# Altium PCB PCB1.PcbDoc
Units mil, origin at the board's own origin, x right, y up, seen from the top; angles counter-clockwise.
Board outline 5250 x 4000 mil, 2 copper layers (Top Layer, Bottom Layer); 35 components, 24 nets, 125 pads, 0 vias.
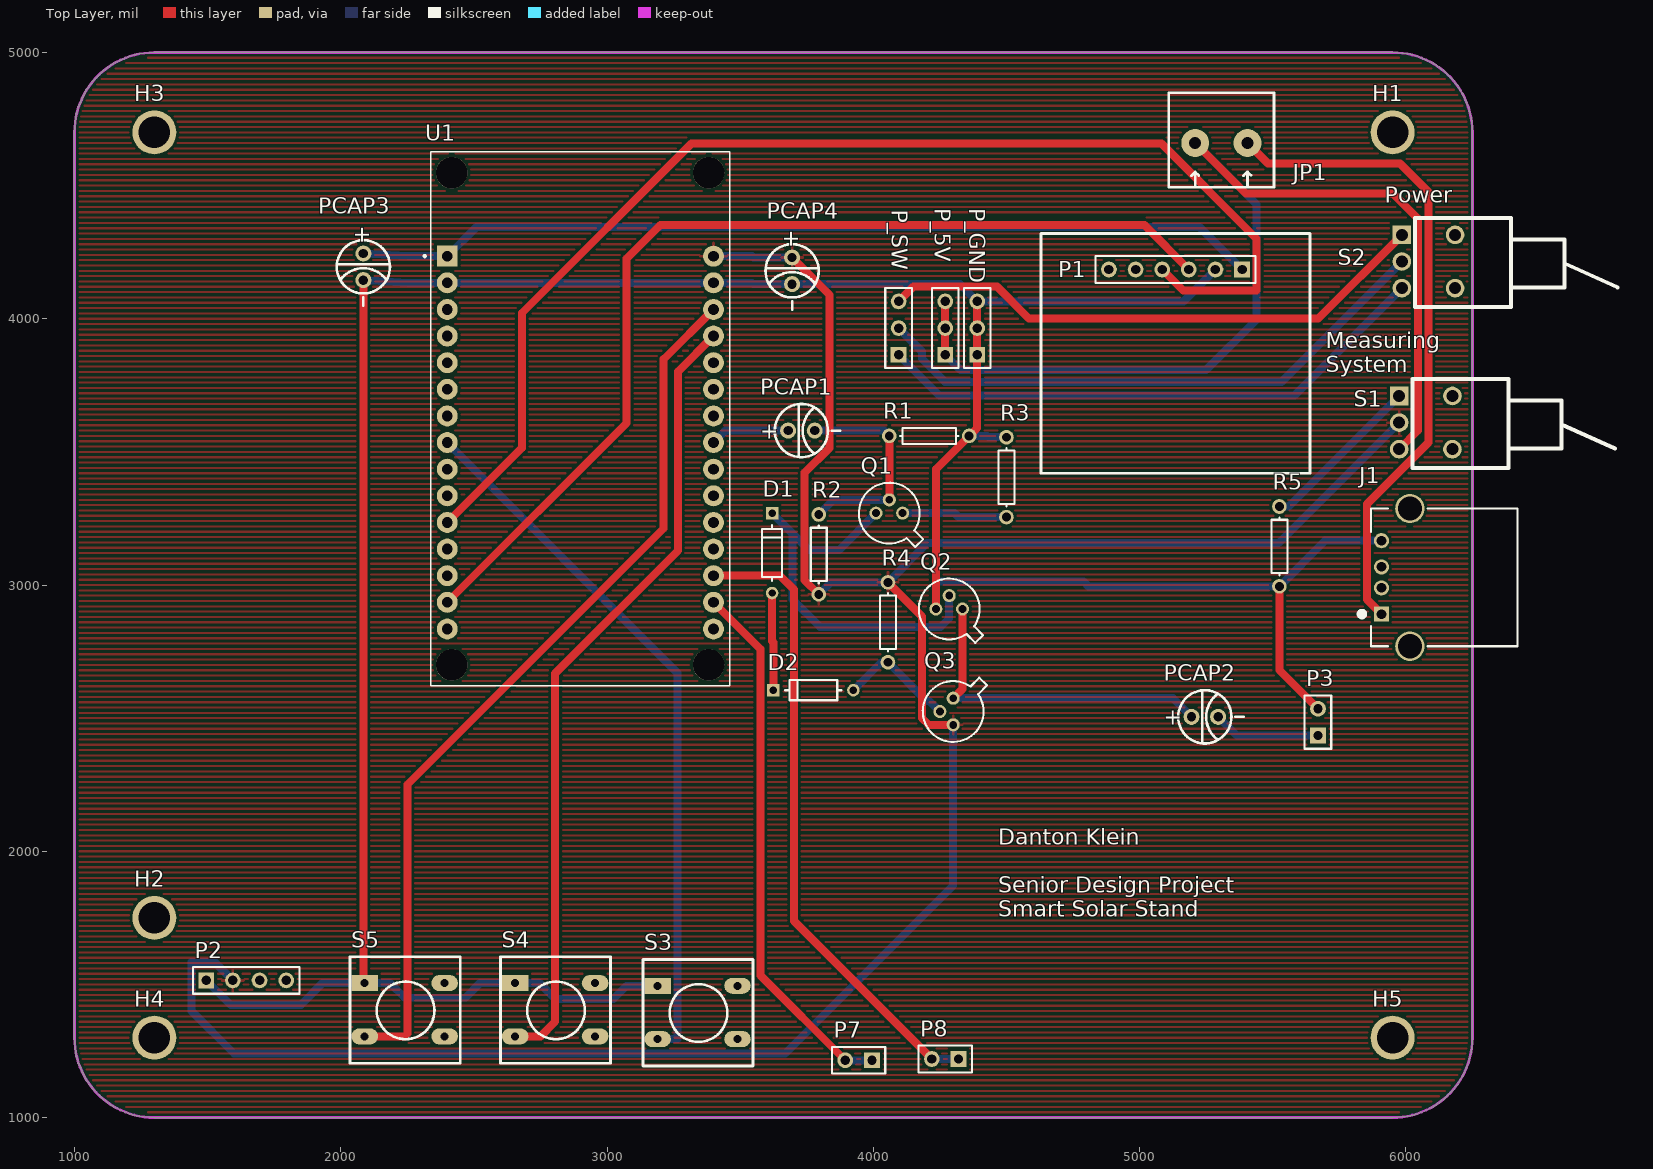
[diagram p0: Top Layer view]
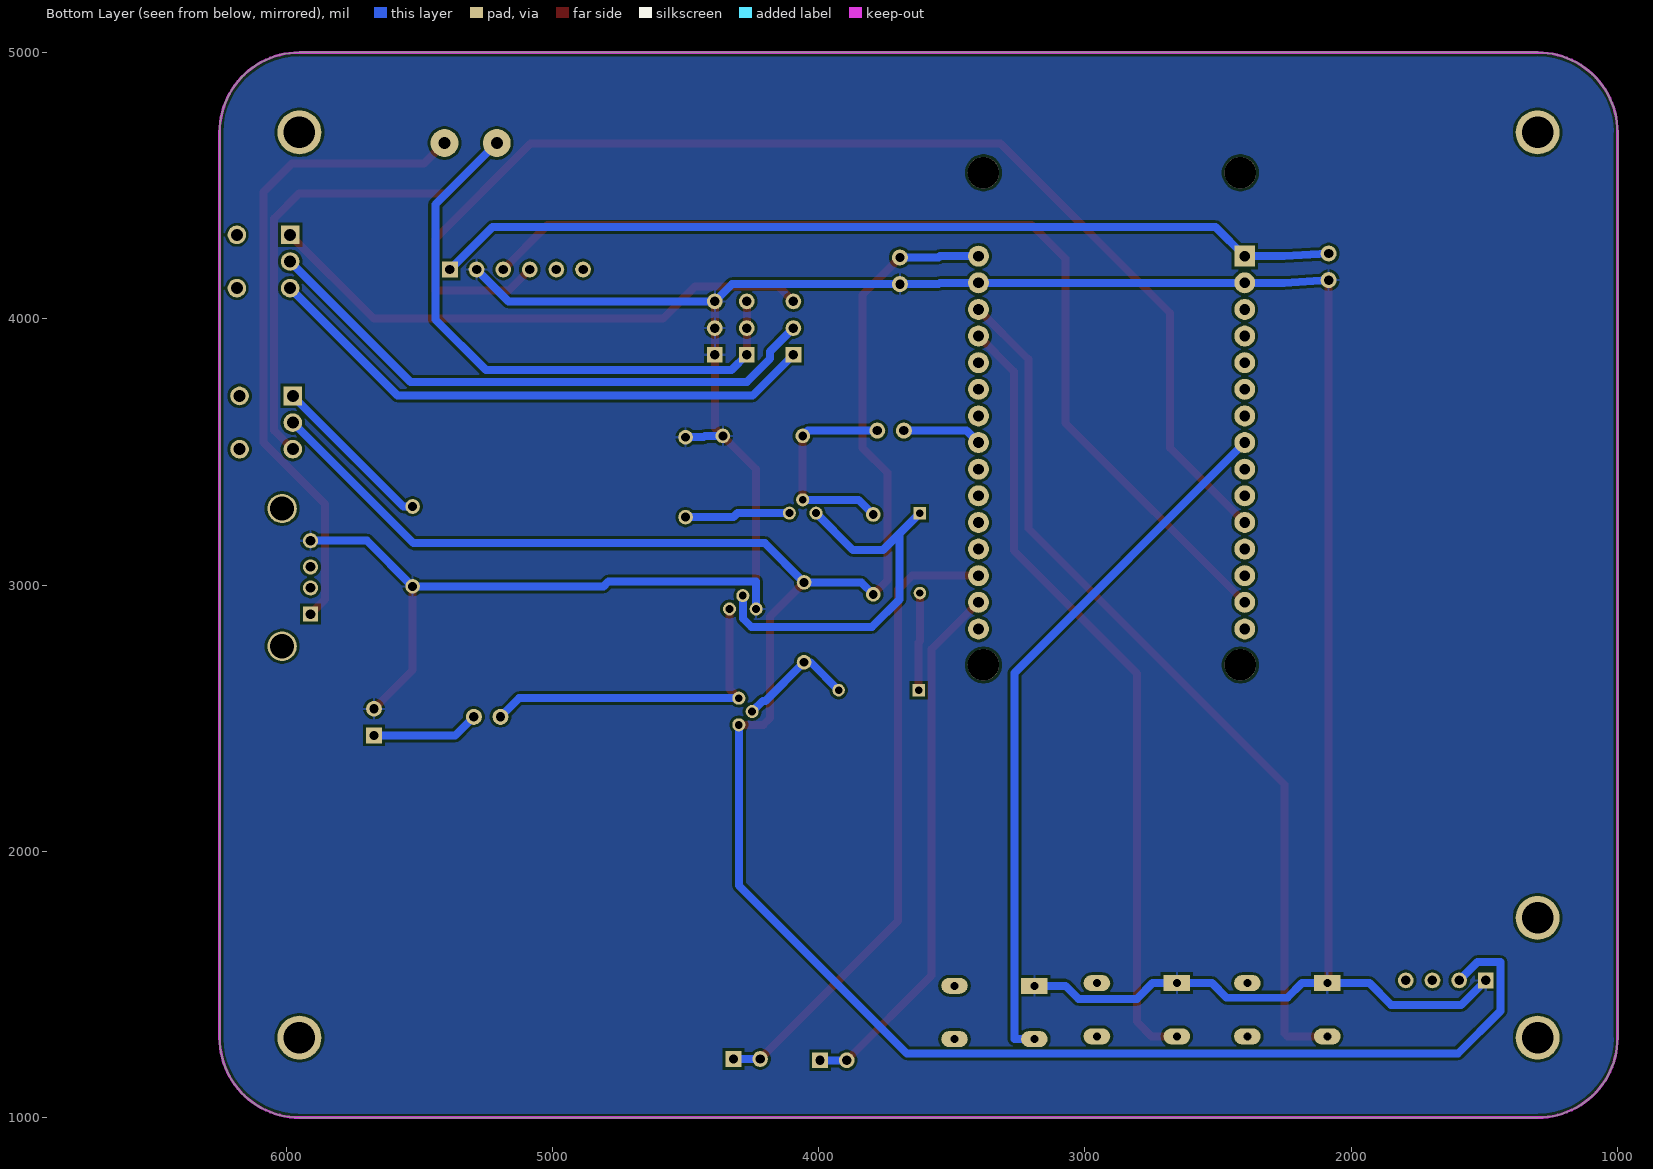
[diagram p1: Bottom Layer view, seen from below]

## Layer stack, top to bottom
Top Solder: solder mask 0.4, Solder Resist, Dk 3.5
Top Layer: signal copper 1.4
Dielectric 1: dielectric 12.6, FR-4, Dk 4.8
Bottom Layer: signal copper 1.4
Bottom Solder: solder mask 0.4, Solder Resist, Dk 3.5

## Board outline
1300,1000 cw(c1300,1300) 1000,1300 1000,4700 cw(c1300,4700) 1300,5000 5950,5000 cw(c5950,4700) 6250,4700 6250,1300 cw(c5950,1300) 5950,1000

## Design rules (kind name [scope] priority, off if disabled: settings)
Clearance [All] p1: gap=10 ignorepadtopadclearanceinfootprint=FALSE except(0: Arc-Hole Track-Hole SMDPad-Hole THPad-Hole Via-Hole Fill-Hole Poly-Hole Region-Hole Text-Hole)
PolygonConnect [All] p1: connectstyle=Relief reliefconductorwidth=10 reliefentries=4 polygonreliefangle="90 Angle" airgapwidth=10
RoutingVias [All] p1: holewidth=28 width=50 viastyle="Through Hole" minholewidth=28 minwidth=50 maxholewidth=28 maxwidth=50
SolderMaskExpansion [All] p1: expansion=4 istentingtop=FALSE
Width "Schematic Width Constraint" [All] p1: maxlimit=30 minlimit=30 preferedwidth=30 minimp=50.000000 maximp=50.000000 favimp=50.000000
Width [All] p2: maxlimit=50 minlimit=20 preferedwidth=20 minimp=50.000000 maximp=50.000000 favimp=50.000000
30 further rules are at their usual default settings.

## Components (designator, comment, footprint, x,y, rotation, side; value= is the part's Value field where it differs from the comment)
D1 "1N4148" FP-017AG-MFG 3620,3120 r270 top
D2 "1N4148" FP-017AG-MFG 3775,2605 r0 top
H1 "Hole 3mm" "Hole 3mm" 5950,4700 r0 top
H2 "Hole 3mm" "Hole 3mm" 1300,1750 r270 top
H3 "Hole 3mm" "Hole 3mm" 1300,4700 r270 top
H4 "Hole 3mm" "Hole 3mm" 1300,1300 r0 top
H5 "Hole 3mm" "Hole 3mm" 5950,1300 r0 top
J1 "292303-1" TE-292303-1_V 5953.35,3028.66 r90 top
JP1 "Power Port" CON2screw 5209,4660 r0 top
P1 "Header 6" HDR1X6 5385,4185 r180 top
P2 "Header 4" HDR1X4 1495,1515 r0 top
P3 "Header 2" HDR1X2 5670,2435 r90 top
P7 "Header 2" HDR1X2 3995,1215 r180 top
P8 "Header 2" HDR1X2 4320,1220 r180 top
P_5V "Header 3" HDR1X3 4270,3865 r90 top
P_GND "Header 3" HDR1X3 4390,3865 r90 top
P_SW "Header 3" HDR1X3 4095,3865 r90 top
PCAP1 "1uF" "P Cap - Small" 3680,3580 r0 top
PCAP2 "1000uF" "P Cap - Small" 5195,2505 r0 top
PCAP3 "47uF" "P Cap - Small" 2085,4245 r270 top
PCAP4 "47uF" "P Cap - Small" 3695,4230 r270 top
Q1 "2N3904" STM-TO-18-3 4060,3270 r180 top
Q2 "2N2907A" STM-TO-18-3 4285,2910 r180 top
Q3 "2N2222A" STM-TO-18-3 4300,2525 r270 top
R1 "Res1" AXIAL-0.3 4210,3560 r180 top value=15k
R2 "Res1" AXIAL-0.3 3795,3115 r270 top value=100k
R3 "Res1" AXIAL-0.3 4500,3405 r270 top value=100
R4 "Res1" AXIAL-0.3 4055,2860 r90 top value=1k
R5 "Res1" AXIAL-0.3 5525,3145 r90 top value=1000
S1 "SW-SPDT" "SW DPST jameco" 5973.11,3612.36 r90 top
S2 "SW-SPDT" "SW DPST jameco" 5983.11,4217.36 r90 top
S3 "SW-PB" "SW PB" 3190,1495 r0 top
S4 "SW-PB" "SW PB" 2655,1505 r0 top
S5 "SW-PB" "SW PB" 2090,1505 r0 top
U1 "ESP32-DEVKIT-V1" MODULE_ESP32_DEVKIT_V1_NOKEEPOUT 2900,3624.17 r0 top

## Footprints (in the part's own frame and the unit in brackets; to place one, negate y for a bottom-side part, rotate by r counter-clockwise, add the part's x,y. Pads: shape width x height; smd on the part's side, far side on the other; paste and mask are expansions set on the pad)
AXIAL-0.3 [mm] "Axial Device, Thru-Hole; 2 Leads; 0.3 in Pin Spacing"
  round 1.4 hole 0.85: 1(-3.81,0) 2(3.81,0)
  silkscreen extent -2.77,-0.76 2.77,0.76
CON2screw [mil]
  round 105 hole 45: 1(0,0) 2(196,0)
  silkscreen extent -100,-166 296,189
FP-017AG-MFG [mm]
  rect 1.2x1.2 hole 0.7 paste-2539.97 mask+0: 1(-3.813,0)
  round 1.2 hole 0.7 paste-2539.97 mask+0: 2(3.813,0)
  silkscreen extent -2.68,-0.95 2.68,0.95, body extent -4.51,-1.05 4.51,1.05, height 0.25
HDR1X2 [mm] "Connector; Header; 2 Position"
  rect 1.5x1.5 hole 0.9: 1(0,0)
  round 1.5 hole 0.9: 2(2.54,0)
  silkscreen extent -1.27,-1.27 3.81,1.27
HDR1X3 [mm] "Connector; Header; 3 Position"
  rect 1.5x1.5 hole 0.9: 1(0,0)
  round 1.5 hole 0.9: 2(2.54,0) 3(5.08,0)
  silkscreen extent -1.27,-1.27 6.35,1.27
HDR1X4 [mm] "Connector; Header; 4 Position"
  rect 1.5x1.5 hole 0.9: 1(0,0)
  round 1.5 hole 0.9: 2(2.54,0) 3(5.08,0) 4(7.62,0)
  silkscreen extent -1.27,-1.27 8.89,1.27
HDR1X6 [mm] "Connector; Header; 6 Position"
  rect 1.5x1.5 hole 0.9: 1(0,0)
  round 1.5 hole 0.9: 2(2.54,0) 3(5.08,0) 4(7.62,0) 5(10.16,0) 6(12.7,0)
  silkscreen extent -1.27,-1.27 13.97,1.27
"Hole 3mm" [mil]
  round 165 hole 118.11: 1(0,0)
MODULE_ESP32_DEVKIT_V1_NOKEEPOUT [mm]
  rect 2x2 / inner round 2 / far side rect 2x2 hole 1.02: 1(-12.7,15.515)
  round 2 hole 1.02: 2(-12.7,12.975) 3(-12.7,10.435) 4(-12.7,7.895) 5(-12.7,5.355) 6(-12.7,2.815) 7(-12.7,0.275) 8(-12.7,-2.265) 9(-12.7,-4.805) 10(-12.7,-7.345) 11(-12.7,-9.885) 12(-12.7,-12.425) 13(-12.7,-14.965) 14(-12.7,-17.505) 15(-12.7,-20.045) 16(12.7,-20.045) 17(12.7,-17.505) 18(12.7,-14.965) 19(12.7,-12.425) 20(12.7,-9.885) 21(12.7,-7.345) 22(12.7,-4.805) 23(12.7,-2.265) 24(12.7,0.275) 25(12.7,2.815) 26(12.7,5.355) 27(12.7,7.895) 28(12.7,10.435) 29(12.7,12.975) 30(12.7,15.515)
  round 3 hole 3 unplated: ""(-12.28,-23.475) ""(-12.28,23.475) ""(12.23,-23.475) ""(12.23,23.475)
  silkscreen extent -14.95,-25.47 14.23,25.47
"P Cap - Small" [mil]
  round 60 hole 35: 1(0,0) 2(100,0)
  silkscreen extent -50,-100 195,100
STM-TO-18-3 [mm] "TO, 3-Leads, Diameter 5.8mm"
  round 1.25 hole 0.75: 1(0,-1.27) 2(1.27,0) 3(-1.27,0)
  silkscreen extent -3.23,-2.9 2.9,3.23, body extent -3.23,-2.9 2.9,3.23, height 5.3
"SW DPST jameco" [mil]
  rect 70x70 hole 45: 1(97.64,-1.89)
  round 70 hole 45: 2(-2.36,-1.89) 3(-102.36,-1.89) 4(-102.36,-201.89) 5(97.64,-201.89)
  silkscreen extent -172,-812 162,-52
"SW PB" [mil]
  rect 100x60 hole 30: 1(0,0)
  oval 100x60 hole 30: 2(0,-200) 3(300,-200) 4(300,0)
  silkscreen extent -55,-302 358,98
TE-292303-1_V [mm] "THD, 4-Leads, Body 13.13x14mm, Pitch 2.5mm"
  rect 1.45x1.45 hole 0.92: 1(-3.5,1.144)
  round 1.45 hole 0.92: 2(-1,1.144) 3(1,1.144) 4(3.5,1.144)
  round 2.8 hole 2.3: 5(-6.57,-1.566) 6(6.57,-1.566)
  silkscreen extent -6.56,-11.85 6.56,3.25, body extent -8.12,-11.85 8.12,2.15, height 7.72

## Part data
D1 D2: library part CMP-07163-000046-1, "DIODE GEN PURP 100V 200MA DO35", Average Rectified Current=200mA, Capacitance=4pF, Case/Package=DO-35, Current=4A, Forward Current=300mA, Forward Voltage=1V, Max Forward Surge Current (Ifsm)=1A, Max Operating Temperature=175°C, Max Power Dissipation=500mW, Max Repetitive Reverse Voltage (Vrrm)=100V, Max Reverse Current=5uA, Min Operating Temperature=-65°C, Package Quantity=2000, Contact Plating=Tin, Current Rating=200mA, Diameter=1.91mm, Element Configuration=Single, Height=4.56mm, Lead Free="Lead Free", Length=4.56mm, Max Reverse Voltage (DC)=100V, Max Surge Current=4A, Mount="Through Hole", Number of Pins=2, Output Current=200mA, Outside Diameter=1.85mm, Packaging=Bulk, Peak Non-Repetitive Surge Current=4A, Polarity=Standard, Power Dissipation=500mW, Radiation Hardening=No, REACH SVHC="No SVHC", Recovery Time=4ns, Reverse Recovery Time=4ns, Reverse Voltage=100V, Series=-, Voltage=100V, Voltage Rating (DC)=100V, Weight=0.01lb, Width=1.91mm
J1: library part CMP-2000-05404-1, "1 Port Right Angle Through Hole Mount Female Type A USB Connector, 4 Position, -55 to 85 degC, RoHS, Tube", Manufacturer="TE Connectivity", Package Description="4-Pin Through Hole Device, Body 14 x 13.13 mm, Pitch 2.5 mm", Connector Mounting=PCB, Connector Type=USBA, Contact Material=Copper, Contact Plating=Gold, Contact Termination Type=Solder, Datasheet URL=http://www.farnell.com/cad/1653030.pdf, Datasheet Version=Feb-12, Gender=Receptacle, Manufacturer URL=http://www.te.com/, No. of Contacts=4, Package Reference=292303-1, SVHC=NoSVHC(16-Jun-2014)
JP1: library part Power
P1: "Header, 6-Pin", LatestRevisionDate=17-Jul-2002, LatestRevisionNote="Re-released for DXP Platform.", Publisher="Altium Limited"
P2: "Header, 4-Pin", LatestRevisionDate=17-Jul-2002, LatestRevisionNote="Re-released for DXP Platform.", Publisher="Altium Limited"
P3 P7 P8: "Header, 2-Pin", LatestRevisionDate=17-Jul-2002, LatestRevisionNote="Re-released for DXP Platform.", Publisher="Altium Limited"
P_5V P_GND P_SW: "Header, 3-Pin", LatestRevisionDate=17-Jul-2002, LatestRevisionNote="Re-released for DXP Platform.", Publisher="Altium Limited"
PCAP1 PCAP2 PCAP3 PCAP4: library part "P Cap"
Q1 Q3: library part CMP-2000-05381-1, "High Speed Switch, 0.6 A IC, -65 to 175 degC, 3-Pin TO-18, RoHS, Bulk", Collector Emitter Voltage V(br)ceo=40V, DC Collector Current=600mA, DC Current Gain hFE=300hFE, Manufacturer=STMicroelectronics, Operating Temperature Max=175degC, Package Description="3-Pin Through Hole Device, Dia 5.8 mm, Pitch 1.27 mm", Package Reference=TO-18-3, Power Dissipation Pd=500mW, Transistor Case Style=TO-18, Transition Frequency ft=300MHz, Automotive Qualification Standard=-, Datasheet URL=https://datasheet.ciiva.com/25917/cd00003223-25917094.pdf, Datasheet Version=Feb-03, Manufacturer URL=http://www.st.com/, No. of Pins=3Pins, Product Range=-, Transistor Polarity=NPN
Q2: library part CMP-2000-05561-1, "Small Signal PNP Transistor, 0.4 W, 60 V, 600 mA, 3-Pin TO-18, RoHS, Bulk", Collector Emitter Voltage V(br)ceo=-60V, DC Collector Current=-600mA, DC Current Gain hFE=300hFE, Manufacturer=STMicroelectronics, Operating Temperature Max=175°C, Package Description="3-Pin Through Hole Device, Dia 5.8 mm, Pitch 1.27 mm", Package Reference=TO-18-3, Power Dissipation Pd=400mW, Transistor Case Style=TO-18, Transition Frequency ft=200MHz, Automotive Qualification Standard=-, Datasheet URL=https://datasheet.ciiva.com/16614/cd00003088-16614659.pdf, Datasheet Version=02/2003, Manufacturer URL=http://www.st.com/, Mounting Technology=ThroughHole, MSL=-, No. of Pins=3Pins, Product Range=-, SVHC=NoSVHC(17-Dec-2015), Transistor Polarity=PNP
R1 R2 R3 R4 R5: "Resistor", LatestRevisionDate=17-Jul-2002, LatestRevisionNote="Re-released for DXP Platform.", PackageDescription="Axial Device, Thru-Hole; 2 Leads; 0.3 in Pin Spacing", PackageReference=AXIAL-0.3, Published=8-Jun-2000, Publisher="Altium Limited"
S1 S2: "SPDT Subminiature Toggle Switch, Right Angle Mounting, Vertical Actuation", ComponentLink1Description="Manufacturer Link", ComponentLink1URL=http://www.apem.com, DatasheetVersion=05-Dec-2000, LatestRevisionDate=17-Dec-2003, LatestRevisionNote="Schematic revised, PCB Footprint replaced.", PackageDescription="Switch; 4 Leads", PackageReference=TL36WW15050, Published=24-Mar-1999, Publisher="Altium Limited"
S3 S4 S5: "DIGIKEY SW400-ND", LatestRevisionDate=17-Jul-2002, LatestRevisionNote="Re-released for DXP Platform.", Published=24-Mar-1999, Publisher="Altium Limited"
U1: "Dual core, Wi-Fi: 2.4 GHz up to 150 Mbits/s,BLE (Bluetooth Low Energy) and legacy Bluetooth, 32 bits, Up to 240 MHz", Package=None, Availability="Not in stock", Check_prices=https://www.snapeda.com/parts/ESP32-DEVKIT-V1/Do+it/view-part/?ref=eda, MF="Do it", MP=ESP32-DEVKIT-V1, Price=None, SnapEDA_Link=https://www.snapeda.com/parts/ESP32-DEVKIT-V1/Do+it/view-part/?ref=snap

## Nets (pads, with @x,y where several pads share a name; then routed paths per layer and width w, separated by ;. In a path a pad name is that pad's centre, name@x,y a point inside that pad or via, vN(x,y) a via of type N, cw(c..) or ccw(c..) an arc to the next point about the centre after c; other vN are vias at no path point)
+3: P1.1 PCAP3.1 U1.1 | length 3412.1
  Bottom Layer w30: PCAP3.1 2252,4235 U1.1 2510,4345 5225,4345 P1.1
+5: P2.2 PCAP4.1 Q3.2 R2.2 R4.2 S1.2 U1.30 | length 8976.7
  Top Layer w30: PCAP4.1 3835,4090 3835,3515 3742,3422 3742,3018 R2.2 ; R4.2 4183,2882 4183,2500 4208,2475 Q3.2
  Bottom Layer w30: P2.2 1526,1584 1440,1584 1440,1400 1600,1240 3668,1240 4300,1872 Q3.2 ; U1.30 3545,4235 3550,4230 PCAP4.1 ; R2.2 3840,3010 R4.2 4202,3157 5522,3157 S1.2
+5_FULL: JP1.1 P_5V.1 P_5V.2 P_5V.3 S1.3 | length 4080.2
  Top Layer w30: P_5V.1 P_5V.2 P_5V.3 ; JP1.1 5399,4470 5951.25,4470 6045,4376.25 6045,3580 S1.3
  Bottom Layer w30: P_5V.1 4328,3807 5250,3807 5440,3997 5440,4429 JP1.1
GND: J1.4 P1.2 P2.1 P3.2 P_GND.1 P_GND.2 P_GND.3 PCAP3.2 PCAP4.2 Q2.2 R1.1 R3.1 R5.1 S3.1 S4.1 S5.1 U1.2 U1.29 | length 11517.5
  Top Layer w30: PCAP3.2 2085,1505 S5.1 ; Q2.2 4235,3435 R1.1 4390,3590 P_GND.1 P_GND.2 P_GND.3 ; R5.1 5525,2680 P3.2
  Bottom Layer w30: P2.1 1587,1423 1850,1423 1932,1505 S5.1 2185,1505 2240,1450 2468,1450 2523,1505 S4.1 2746,1505 2805,1446 3024,1446 3073,1495 S3.1 ; PCAP3.2 2252,4135 U1.2 U1.29 3545,4135 3550,4130 PCAP4.2 4325,4130 P_GND.3 5165,4065 P1.2 ; Q2.2 4235,3013 4790,3013 4808,2995 R5.1 5696.46,3166.46 J1.4 ; R1.1 4427,3560 4432,3555 R3.1
NetD1_1: D1.1 Q1.2 Q2.1 | length 1480.4
  Bottom Layer w30: D1.1 3697,3193.12 ; Q1.2 3872,3132 3758.12,3132 3697,3193.12 ; Q2.1 4285,2875 4253,2843 3800,2843 3697,2946 3697,3193.12
NetD1_2: D1.2 D2.1 | length 366.9
  Top Layer w30: D1.2 3620,2789.88 3624.88,2785 D2.1
NetD2_2: D2.2 Q3.1 R4.1 | length 445
  Bottom Layer w30: D2.2 4030.12,2710 R4.1 4200,2565 4210,2565 Q3.1
NetJ1_1: J1.1 JP1.2 | length 2459.5
  Top Layer w30: JP1.2 5482,4583 5978,4583 6085,4476 6085,3535 5854,3304 5854,2945.17 J1.1
NetP1_3: P1.3 U1.14 | length 3802.5
  Top Layer w30: U1.14 3074,3609 3074,4226 3200,4352 5018,4352 P1.3
NetP1_4: P1.4 U1.11 | length 4655.8
  Top Layer w30: U1.11 2680,3515 2680,4021 3317,4658 5082,4658 5440,4300 5440,4106 5164,4106 P1.4
NetP3_1: P3.1 PCAP2.2 | length 404
  Bottom Layer w30: PCAP2.2 5365,2435 P3.1
NetP7_1: P7.1 P7.2 U1.17 | length 2025
  Top Layer w30: U1.17 3576,2759 3576,1534 P7.2
  Bottom Layer w30: P7.2 P7.1
NetP8_1: P8.1 P8.2 U1.18 | length 2401.1
  Top Layer w30: U1.18 3650,3035 3702,2983 3702,1738 P8.2
  Bottom Layer w30: P8.2 P8.1
NetP_SW_1: P_SW.1 S2.3 | length 2120.3
  Bottom Layer w30: P_SW.1 4248,3712 5582,3712 S2.3
NetP_SW_2: P_SW.2 S2.2 | length 2176.7
  Bottom Layer w30: P_SW.2 4183,3877 4183,3850 4270,3763 5533,3763 S2.2
NetP_SW_3: P_SW.3 S2.1 | length 2093
  Top Layer w30: P_SW.3 4151,4121 4464,4121 4584,4001 5671,4001 S2.1
NetPCAP1_1: PCAP1.1 U1.23 | length 298.6
  Bottom Layer w30: U1.23 3445,3580 PCAP1.1
NetPCAP1_2: PCAP1.2 Q1.1 R1.2 R2.1 | length 816.1
  Top Layer w30: Q1.1 R1.2
  Bottom Layer w30: PCAP1.2 4040,3580 R1.2 ; R2.1 3850,3320 Q1.1
NetPCAP2_1: PCAP2.1 Q2.3 Q3.3 | length 1273.5
  Top Layer w30: Q3.3 4335,2610 Q2.3
  Bottom Layer w30: Q3.3 5125,2575 PCAP2.1
NetQ1_3: Q1.3 R3.2 | length 396.2
  Bottom Layer w30: Q1.3 4305,3270 4320,3255 R3.2
NetR5_2: R5.2 S1.1 | length 621.9
  Bottom Layer w30: R5.2 5560,3295 S1.1
NetS3_2: S3.2 U1.8 | length 2673.3
  Bottom Layer w30: U1.8 3265,2670 3265,1295 S3.2
NetS4_2: S4.2 U1.27 | length 2994.2
  Top Layer w30: S4.2 2750,1305 2805,1360 2805,2668 3266,3129 3266,3801 U1.27
NetS5_2: S5.2 U1.28 | length 3360.5
  Top Layer w30: S5.2 2240,1305 2250,1315 2250,2250 3213,3213 3213,3848 U1.28
pads on no net: H1.1 H2.1 H3.1 H4.1 H5.1 J1.2 J1.3 J1.5 J1.6 P1.5 P1.6 P2.3 P2.4 S1.4 S1.5 S2.4 S2.5 S3.3 S3.4 S4.3 S4.4 S5.3 S5.4 U1. U1.3 U1.4 U1.5 U1.6 U1.7 U1.9 U1.10 U1.12 U1.13 U1.15 U1.16 U1.19 U1.20 U1.21 U1.22 U1.24 U1.25 U1.26

## Polygon pours and split planes (outlines as drawn)
GND on Bottom Layer "GND_L02_P002" (solid, pour order 2): 1300,1000 cw(c1300,1300) 1000,1300 1000,4700 cw(c1300,4700) 1300,5000 5950,5000 cw(c5950,4700) 6250,4700 6250,1300 cw(c5950,1300) 5950,1000
+5 on Top Layer "+5_L01_P003" (hatched Horizontal grid 20 track 8, pour order 3): 1300,1000 cw(c1300,1300) 1000,1300 1000,4700 cw(c1300,4700) 1300,5000 5950,5000 cw(c5950,4700) 6250,4700 6250,1300 cw(c5950,1300) 5950,1000

## Keep-outs
Keep-Out Layer:
  lines w10: 5950,1000 ccw(c5950,1300) 6250,1300 ; 5955,1000 1300,1000 cw(c1300,1300) 1000,1300 1000,4700 cw(c1300,4700) 1300,5000 5950,5000 cw(c5950,4700) 6250,4700 6250,1295

## Silkscreen, mask and mechanical layers (free items; w line width, h text height)
Top Overlay:
  lines w10: 4630,3420 5640,3420 5640,4320 4630,4320 4630,3420
  text "Power" at 5920,4435 h60
  text "Measuring  / System" at 5700,3800 h60
  text "Danton Klein /   / Senior Design Project / Smart Solar Stand" at 4470,1755 h60

## Text inside footprints (layer, text, board x,y; h text height)
PCAP1: Top Overlay "+" at 3575,3550 h60
PCAP2: Top Overlay "+" at 5090,2475 h60
PCAP3: Top Overlay "+" at 2055,4350 h60 r270
PCAP4: Top Overlay "+" at 3665,4335 h60 r270